# Altium PCB MIDI_Interface.PcbDoc
Units mm, origin at the board's own origin, x right, y up, seen from the top; angles counter-clockwise.
Board outline 40 x 64.1 mm, 2 copper layers (Top Layer, Bottom Layer); 25 components, 19 nets, 69 pads, 2 vias.
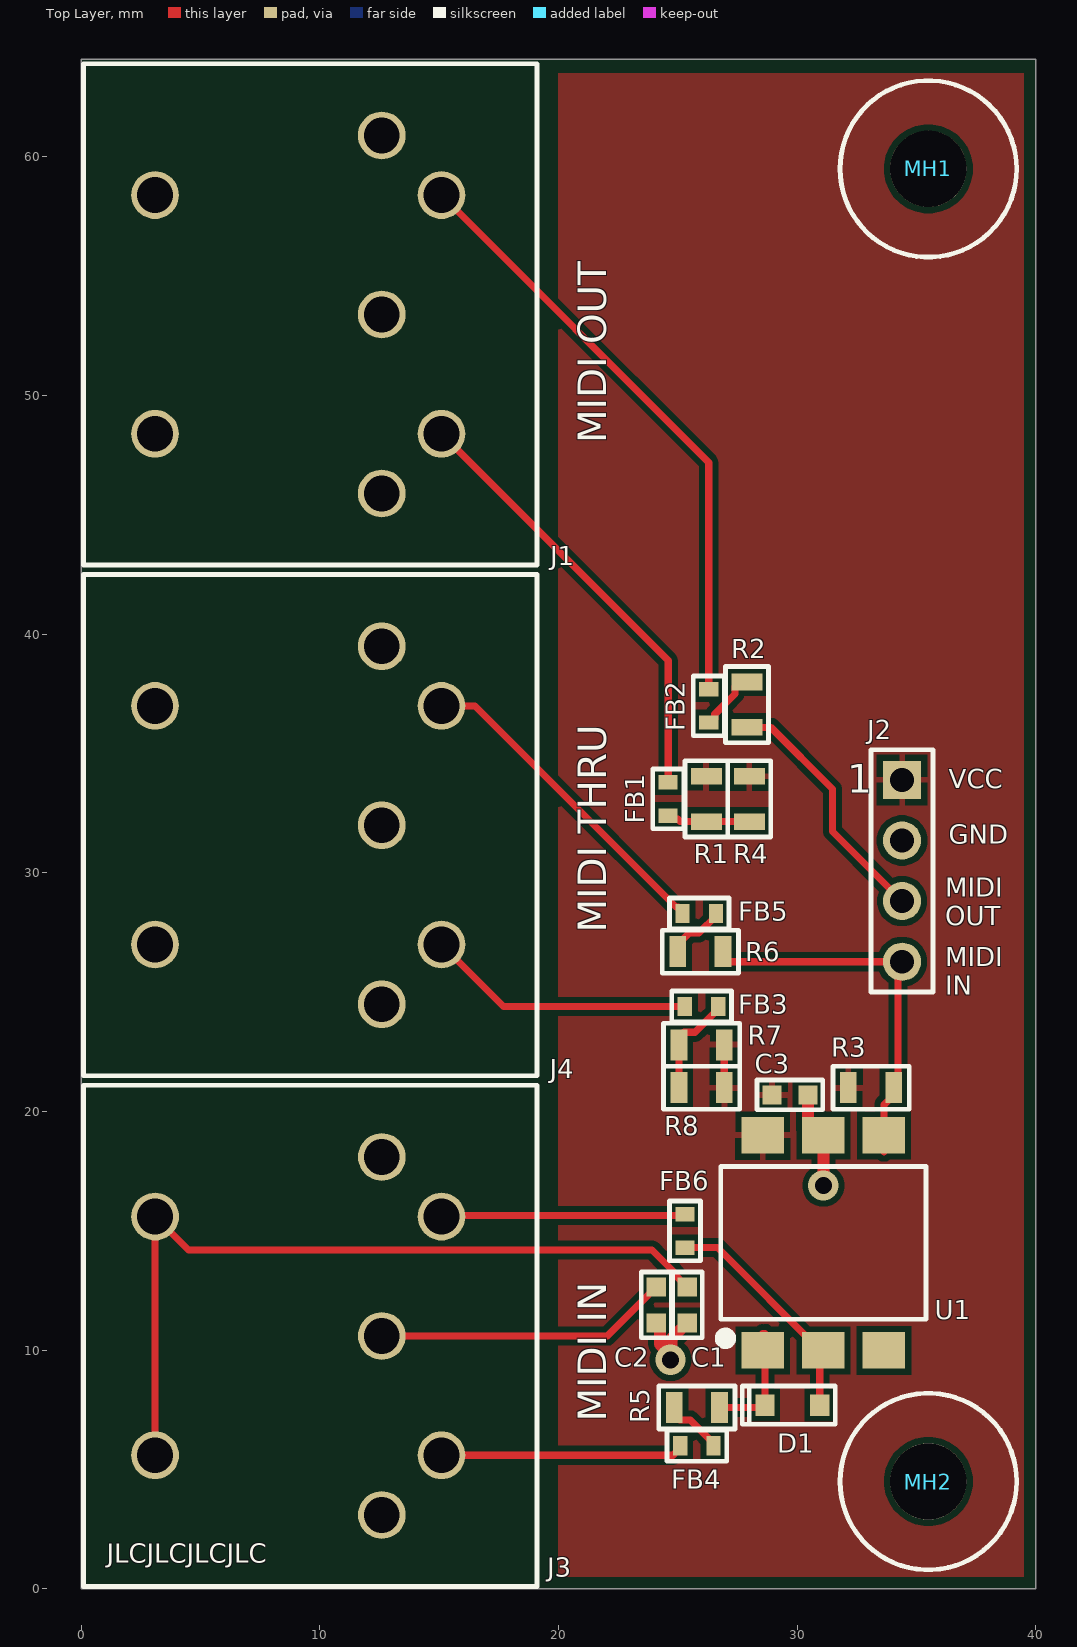
[diagram p0: Top Layer view]
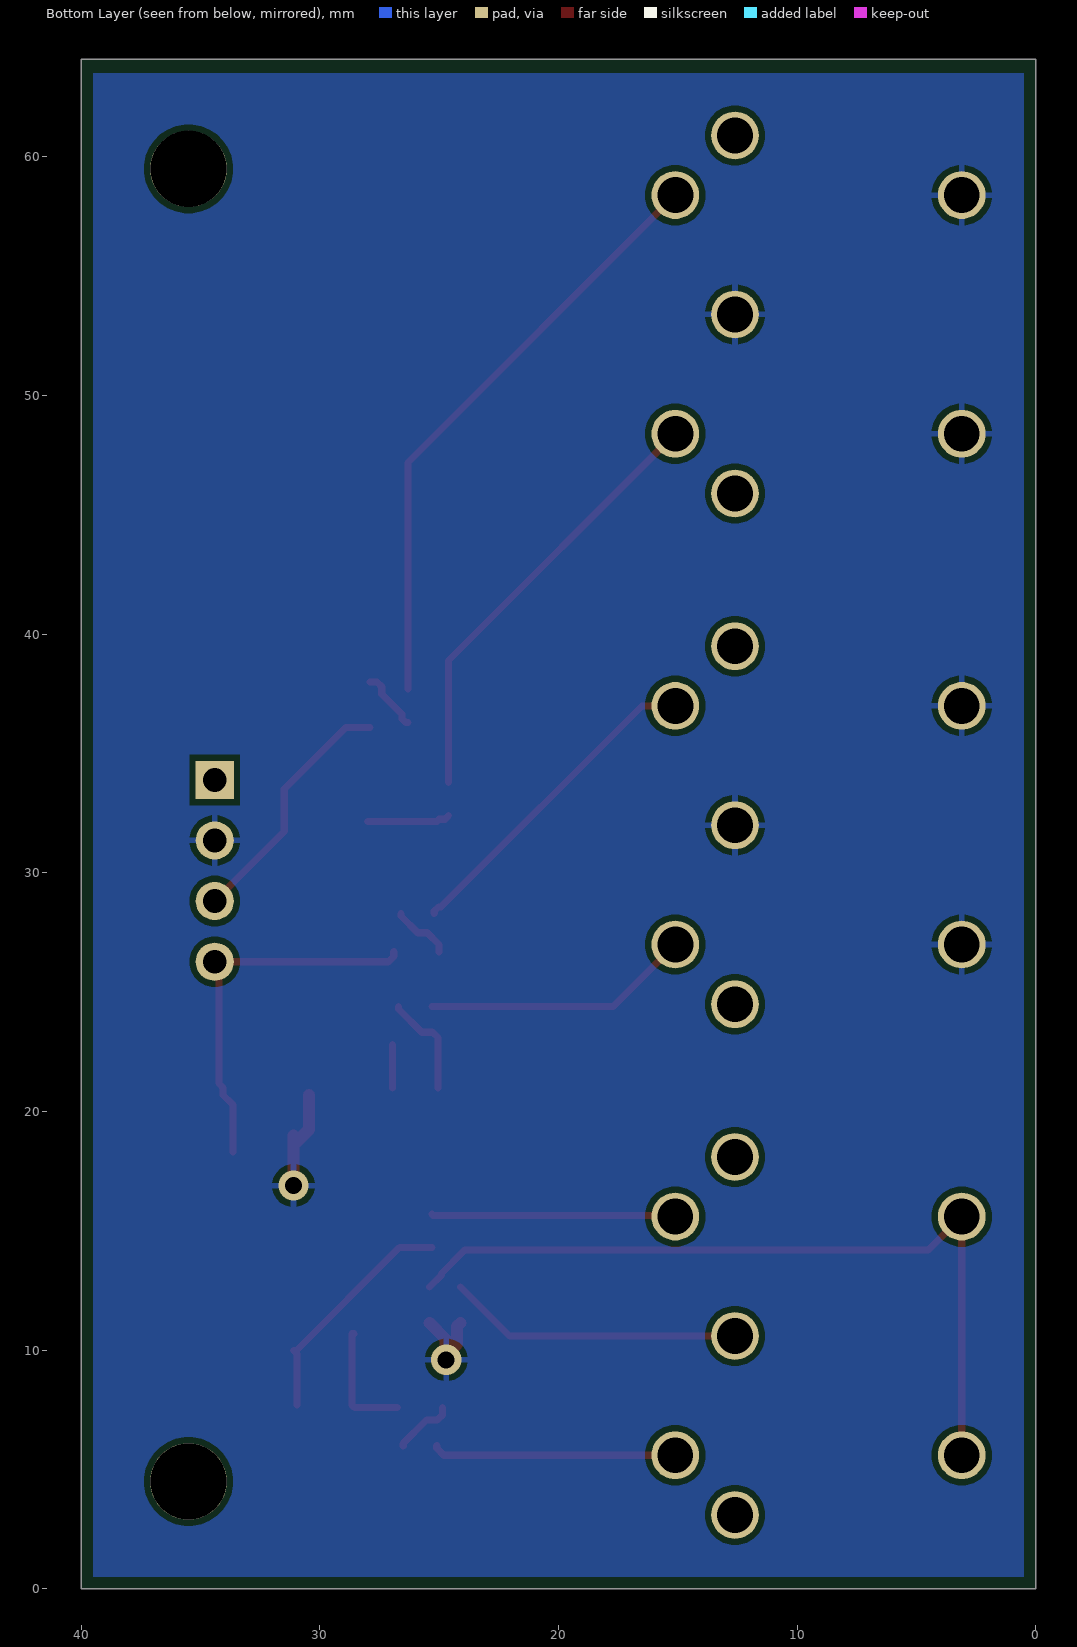
[diagram p1: Bottom Layer view, seen from below]
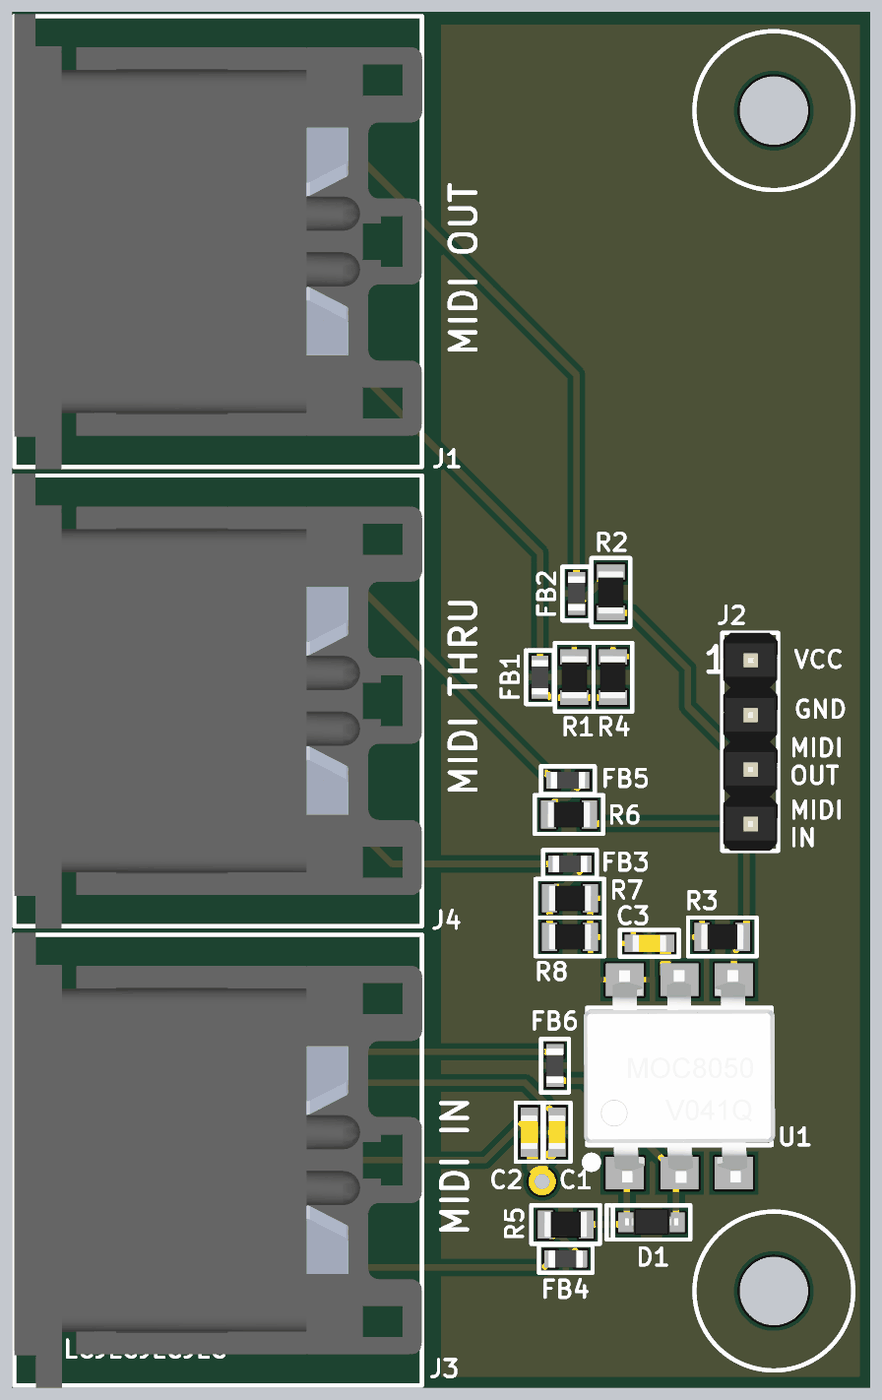
[diagram p2: 3D render of the assembled board from above, using the file's embedded part models]

## Layer stack, top to bottom
Top Solder: solder mask 0.0102, Solder Resist, Dk 3.5
Top Layer: signal copper 0.0356
Dielectric 1: dielectric 0.32, FR-4, Dk 4.8
Bottom Layer: signal copper 0.0356
Bottom Solder: solder mask 0.0102, Solder Resist, Dk 3.5

## Board outline
0,0 0,64.1 40,64.1 40,0

## Design rules (kind name [scope] priority, off if disabled: settings)
Clearance [All] p1: gap=0.254 ignorepadtopadclearanceinfootprint=FALSE except(0: Arc-Hole Track-Hole SMDPad-Hole THPad-Hole Via-Hole Fill-Hole Poly-Hole Region-Hole Text-Hole)
ComponentClearance [All] p1: gap=0.1 collisioncheckmode=3 verticalgap=0.1 showdistances=FALSE
MinimumSolderMaskSliver [All] p1: minsoldermaskwidth=0.1
PolygonConnect [All] p1: connectstyle=Relief reliefconductorwidth=0.254 reliefentries=4 polygonreliefangle="90 Angle" airgapwidth=0.254
RoutingVias [All] p1: holewidth=0.711 width=1.27 viastyle="Through Hole" minholewidth=0.711 minwidth=1.27 maxholewidth=0.711 maxwidth=1.27
SilkToSilkClearance [All] p1: silktosilkclearance=0.1
SilkToSolderMaskClearance [IsPad] p1: minsilkscreentomaskgap=0.1 clearancetoexposedcopper=TRUE
SolderMaskExpansion [All] p1: expansion=0.102 istentingtop=FALSE
Width Power [InNet('GND') and InNet('VCC')] p1: maxlimit=5 minlimit=0.5 preferedwidth=0.5 minimp=50.000000 maximp=50.000000 favimp=50.000000
Width Signal [All] p2: maxlimit=0.5 minlimit=0.3 preferedwidth=0.3 minimp=50.000000 maximp=50.000000 favimp=50.000000
26 further rules are at their usual default settings.

## Components (designator, comment, footprint, x,y, rotation, side; value= is the part's Value field where it differs from the comment)
C1 "100n" C0603 25.4,11.9 r90 top
C2 "100n" C0603 24.1,11.9 r90 top
C3 "100n" C0603 29.7,20.7 r180 top
D1 "1N4148WX" SOD323 29.8,7.7 r180 top
FB1 "1k @ 100MHz" FB0603 24.6,33.1 r90 top
FB2 "1k @ 100MHz" FB0603 26.3,37 r90 top
FB3 "1k @ 100MHz" FB0603 26,24.4 r180 top
FB4 "1k @ 100MHz" FB0603 25.8,6 r0 top
FB5 "1k @ 100MHz" FB0603 25.9,28.3 r180 top
FB6 "1k @ 100MHz" FB0603 25.3,15 r270 top
J1 "MIDI DIN-5" "5 PIN MIDI" 12.6,53.4 r90 top
J2 "HDR 1x4" "HDR M 1X4 2.54MM" 34.4,33.9 r0 top
J3 "MIDI DIN-5" "5 PIN MIDI" 12.602,10.6 r90 top
J4 "MIDI DIN-5" "5 PIN MIDI" 12.6,32 r90 top
MH1 "MH_7.4MMNC_3.2MMD" MH_7.4MMD_3.2MMD_NON_COPPER_NPTH 35.5,59.5 r0 top
MH2 "MH_7.4MMNC_3.2MMD" MH_7.4MMD_3.2MMD_NON_COPPER_NPTH 35.5,4.5 r0 top
R1 "68R" R0805 26.2,33.1 r90 top
R2 "10R" R0805 27.9,37.05 r90 top
R3 "280R" R0805 33.1,21 r180 top
R4 "68R" R0805 28,33.1 r90 top
R5 "220R" R0805 25.8,7.6 r0 top
R6 "10R" R0805 25.95,26.7 r180 top
R7 "68R" R0805 26,22.8 r0 top
R8 "68R" R0805 26,21 r0 top
U1 "H11L1M" H11L1M 31.1,14.5 r90 top

## Footprints (in the part's own frame and the unit in brackets; to place one, negate y for a bottom-side part, rotate by r counter-clockwise, add the part's x,y. Pads: shape width x height; smd on the part's side, far side on the other; paste and mask are expansions set on the pad)
"5 PIN MIDI" [mm]
  round 2 hole 1.5: 1(-7.5,0) 2(0,0) 3(7.5,0) 4(-5,-2.5) 5(5,-2.5) 6(-5,9.5) 6(5,9.5)
  silkscreen extent -10.5,-6.5 10.5,12.5, body extent -10.6,-6.51 10.6,12.5, height 19.51
C0603 [mm]
  rect 0.8x0.8 smd: 1(-0.75,0) 2(0.75,0)
  silkscreen extent -1.38,-0.63 1.38,0.63, body extent -0.8,-0.4 0.8,0.4, height 0.96
FB0603 [mm]
  rect 0.6x0.8 smd: 1(-0.7,0) 2(0.7,0)
  silkscreen extent -1.25,-0.65 1.25,0.65, body extent -0.8,-0.4 0.8,0.4, height 0.81
H11L1M [mm]
  rect 1.52x1.78 smd: 1(-4.505,2.54) 2(-4.505,0) 3(-4.505,-2.54) 4(4.505,-2.54) 5(4.505,0) 6(4.505,2.54)
  silkscreen extent -4.2,-4.3 3.2,4.3, body extent -4.97,-4.5 4.97,4.48, height 5.15
"HDR M 1X4 2.54MM" [mm]
  rect 1.6x1.6 hole 1: 1(0,0)
  round 1.6 hole 1: 2(0,-2.54) 3(0,-5.08) 4(0,-7.62)
  silkscreen extent -1.3,-8.88 1.3,1.26, body extent -1.27,-8.89 1.27,1.27, height 9.21
MH_7.4MMD_3.2MMD_NON_COPPER_NPTH [mm]
  round 3.2 hole 3.2 unplated: 1(0,0)
  silkscreen extent -3.7,-3.7 3.7,3.7
R0805 [mm]
  rect 0.7x1.3 smd: 1(-0.95,0) 2(0.95,0)
  silkscreen extent -1.6,-0.9 1.6,0.9, body extent -1,-0.6 1,0.6, height 0.61
SOD323 [mm]
  rect 0.8x0.9 smd: 1(-1.15,0) 2(1.15,0)
  silkscreen extent -1.8,-0.8 2.1,0.8, body extent -1.24,-0.65 1.24,0.6, height 0.94

## Part data
C1 C2 C3: library part C0603KC0G100V104
FB1 FB2 FB3 FB4 FB5 FB6: library part FB0603
J1 J3 J4: library part "MIDI DIN"
J2: library part "HDR M 1x4 2.54MM"
MH1 MH2: "Mounting Hole 7.4mm Diameter (Non Copper), 3.2 Drill NPTH"
R1 R4 R7 R8: library part R0805F68R
R2 R6: library part R0805F10R
R3: library part R0805F280R
R5: library part R0805F220R

## Via types
v1: diameter 1.27, hole 0.711, Top Layer to Bottom Layer, 2 vias

## Nets (pads, with @x,y where several pads share a name; then routed paths per layer and width w, separated by ;. In a path a pad name is that pad's centre, name@x,y a point inside that pad or via, vN(x,y) a via of type N, cw(c..) or ccw(c..) an arc to the next point about the centre after c; other vN are vias at no path point)
GND: C1.1 C2.1 C3.1 J1.2 J1.6 J2.2 J4.2 J4.6 U1.5 | length 8.1
  Top Layer w0.5: C2.1 24.25,11 24.25,10.258 24.7,9.808 v1(24.7,9.6) 24.734,9.634 24.734,10.484 C1.1 ; C3.1 30.45,19.249 U1.5@31.1,18.599 ; v1(31.1,16.9) U1.5@31.1,18.599 ; U1.5 U1.5@31.1,18.599
MIDI_IN: J2.4 R3.1 R6.1 U1.4 | length 17.2
  Top Layer w0.3: R6.1 26.9,26.503 27.123,26.28 J2.4 34.225,26.105 34.225,21.175 R3.1 34.05,20.7 33.64,20.29 U1.4@33.64,19.105 ; U1.4@33.64,18.31 33.64,20.19
MIDI_OUT: J2.3 R2.1 | length 10.6
  Top Layer w0.3: R2.1 28.9,36.1 31.484,33.516 31.484,31.736 J2.3
NetC1_2: C1.2 J3.6 | length 33.6
  Top Layer w0.3: J3.6@3.102,5.6 3.102,15.6 4.506,14.196 23.925,14.196 24.904,13.217 24.904,13.146 C1.2
NetC2_2: C2.2 J3.2 | length 12.3
  Top Layer w0.3: J3.2 22.05,10.6 C2.2
NetD1_1: D1.1 FB6.2 U1.2 | length 9.9
  Top Layer w0.3: FB6.2 26.665,14.3 30.97,9.995 U1.2 30.95,9.845 D1.1
NetD1_2: D1.2 R5.2 U1.1 | length 5.1
  Top Layer w0.3: R5.2 28.55,7.6 D1.2 U1.1@28.65,10.7 ; U1.1@28.56,10.69 U1.1@28.65,10.6
NetFB1_1: FB1.1 R1.1 R4.1 | length 3.5
  Top Layer w0.3: FB1.1 24.75,32.25 25,32.25 25.1,32.15 R1.1 R4.1
NetFB1_2: FB1.2 J1.4 | length 18.5
  Top Layer w0.3: J1.4 24.6,38.9 FB1.2
NetFB2_1: FB2.1 R2.2 | length 2.6
  Top Layer w0.3: FB2.1 26.4,36.3 26.55,36.45 26.55,36.65 27.4,37.5 27.4,37.8 27.6,38 R2.2
NetFB2_2: FB2.2 J1.5 | length 25.3
  Top Layer w0.3: J1.5 26.3,47.2 FB2.2
NetFB3_1: FB3.1 R7.1 R8.1 | length 4.3
  Top Layer w0.3: R8.1 R7.1 25.05,23.1 25.273,23.323 25.723,23.323 26.7,24.3 FB3.1
NetFB3_2: FB3.2 J4.4 | length 11.3
  Top Layer w0.3: J4.4 17.7,24.4 FB3.2
NetFB4_1: FB4.1 J3.4 | length 10.2
  Top Layer w0.3: J3.4 24.8,5.6 25.1,5.9 FB4.1
NetFB4_2: FB4.2 R5.1 | length 2.5
  Top Layer w0.3: R5.1 24.85,7.3 25.073,7.077 25.523,7.077 26.5,6.1 FB4.2
NetFB5_1: FB5.1 R6.2 | length 2.5
  Top Layer w0.3: R6.2 25,27 25.496,27.496 25.896,27.496 26.6,28.2 FB5.1
NetFB5_2: FB5.2 J4.5 | length 13.8
  Top Layer w0.3: J4.5 16.5,37 24.927,28.573 25.027,28.573 25.2,28.4 FB5.2
NetFB6_1: FB6.1 J3.5 | length 10.2
  Top Layer w0.3: J3.5 15.152,15.65 25.25,15.65 FB6.1
VCC: C3.2 J2.1 R1.2 R3.2 R4.2 R7.2 R8.2 U1.6 | length 1.8
  Top Layer w0.3: R8.2 R7.2
pads on no net: J1.1 J1.3 J3.1 J3.3 J4.1 J4.3 MH1.1 MH2.1 U1.3

## Polygon pours and split planes (outlines as drawn)
GND on Bottom Layer "GND_L02_P000" (solid, pour order 0): 39.5,0.5 0.5,0.5 0.5,63.5 39.5,63.5
VCC on Top Layer "VCC_L01_P001" (solid, pour order 1): 39.5,0.5 20,0.5 20,63.5 39.5,63.5

## Silkscreen, mask and mechanical layers (free items; w line width, h text height)
Top Overlay:
  text "MIDI OUT" at 22,48 h1.2 r90
  text "VCC" at 36.35,33.55 h0.8
  text "GND" at 36.35,31.23 h0.8
  text "MIDI / OUT" at 36.2,27.8 h0.8
  text "MIDI THRU" at 22,27.5 h1.2 r90
  text "MIDI / IN" at 36.2,24.9 h0.8
  text "MIDI IN" at 22,7 h1.2 r90
  text "JLCJLCJLCJLC" at 1.085,1.1 h0.8
Board Outline:
  the board outline again, w0.2

## Text inside footprints (layer, text, board x,y; h text height)
J2: Top Overlay "1" at 32.1,33.35 h1.2